# Altium PCB testrack_module_stm32f4v.PcbDoc
Units mm, origin at the board's own origin, x right, y up, seen from the top; angles counter-clockwise.
Board outline 38 x 41.25 mm, 6 copper layers (Top Layer, Signal Layer 1, Signal Layer 2, Signal Layer 3, Signal Layer 4, Bottom Layer), stack 0.827 mm thick; 22 components, 33 nets, 219 pads, 65 vias.
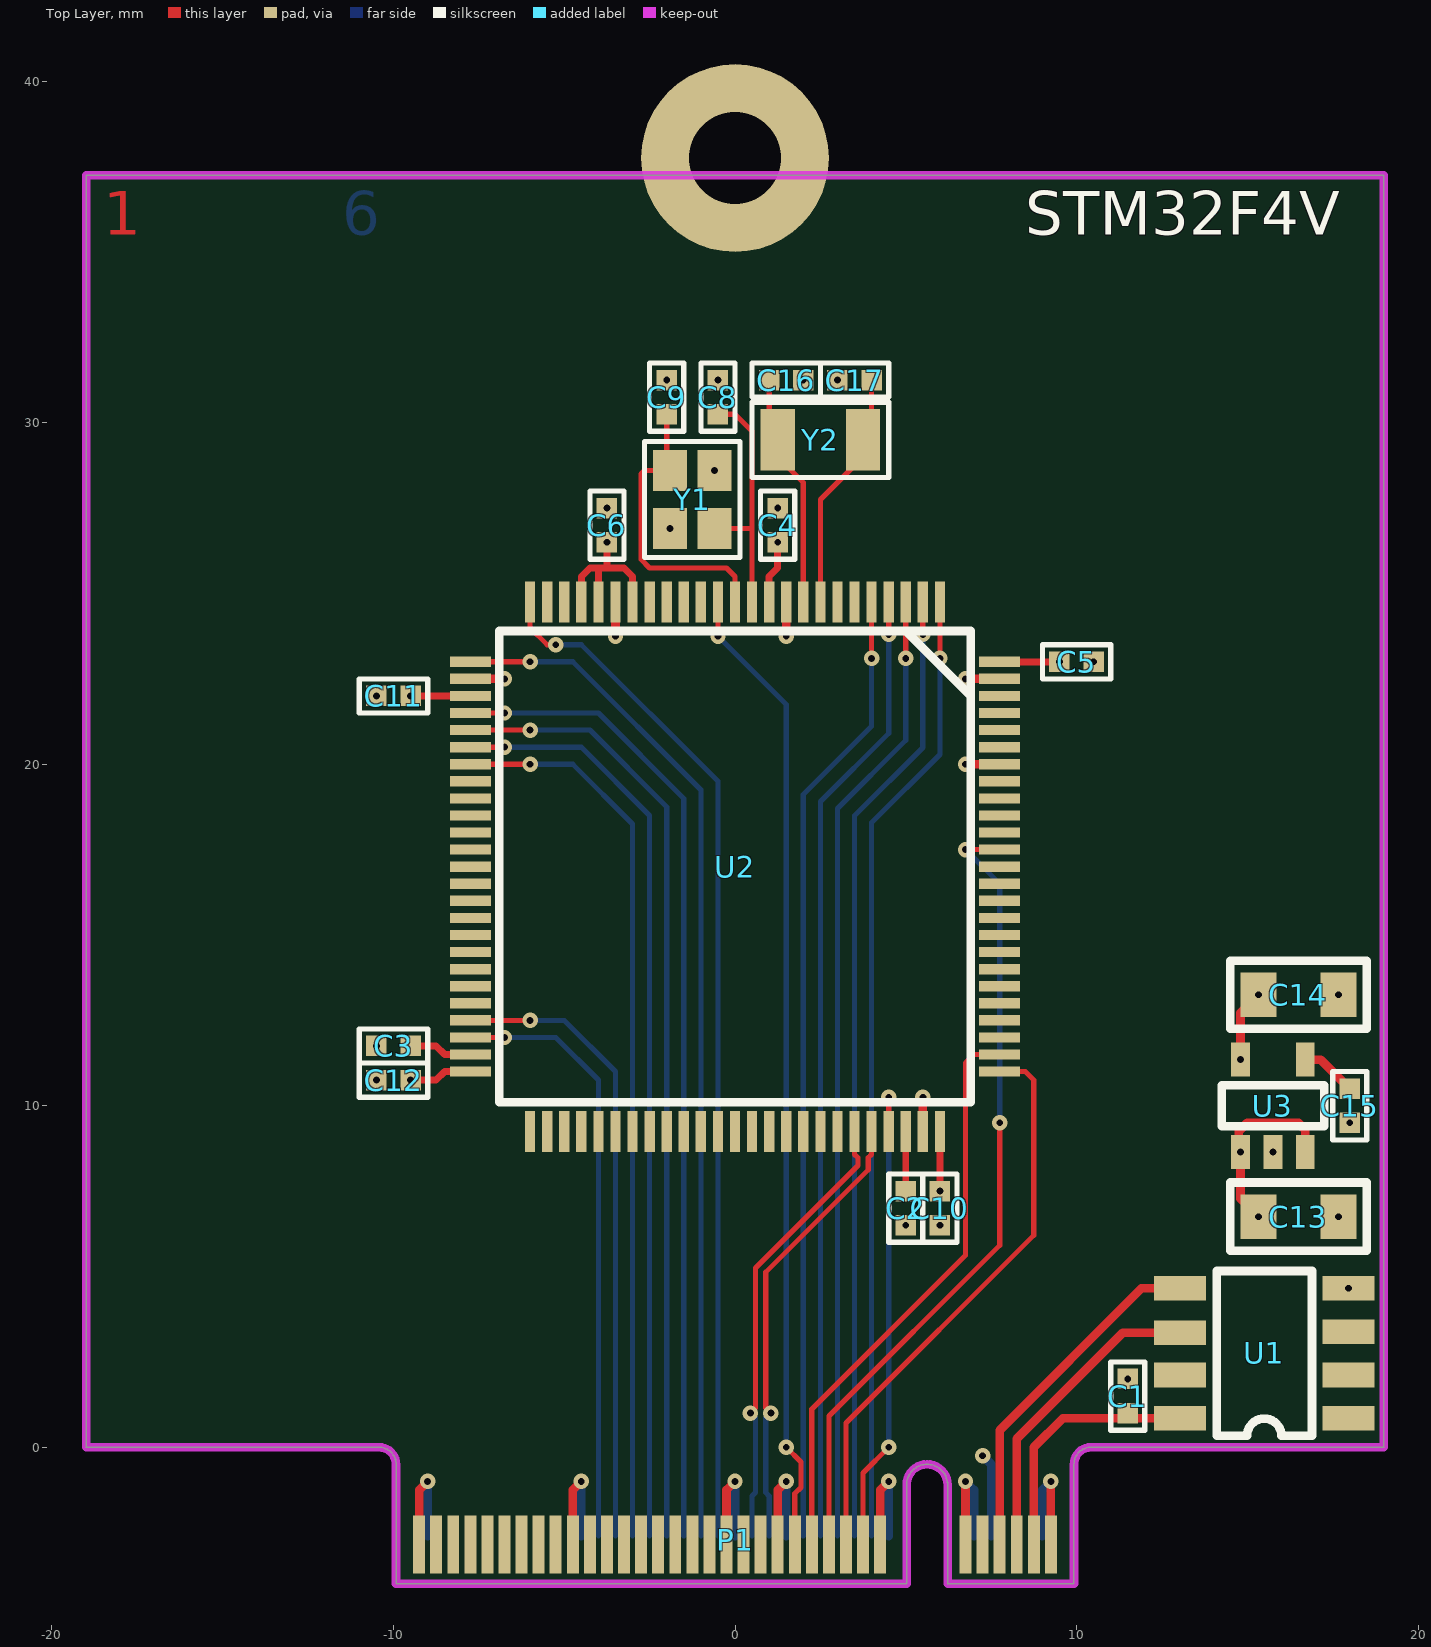
[diagram p0: Top Layer view]
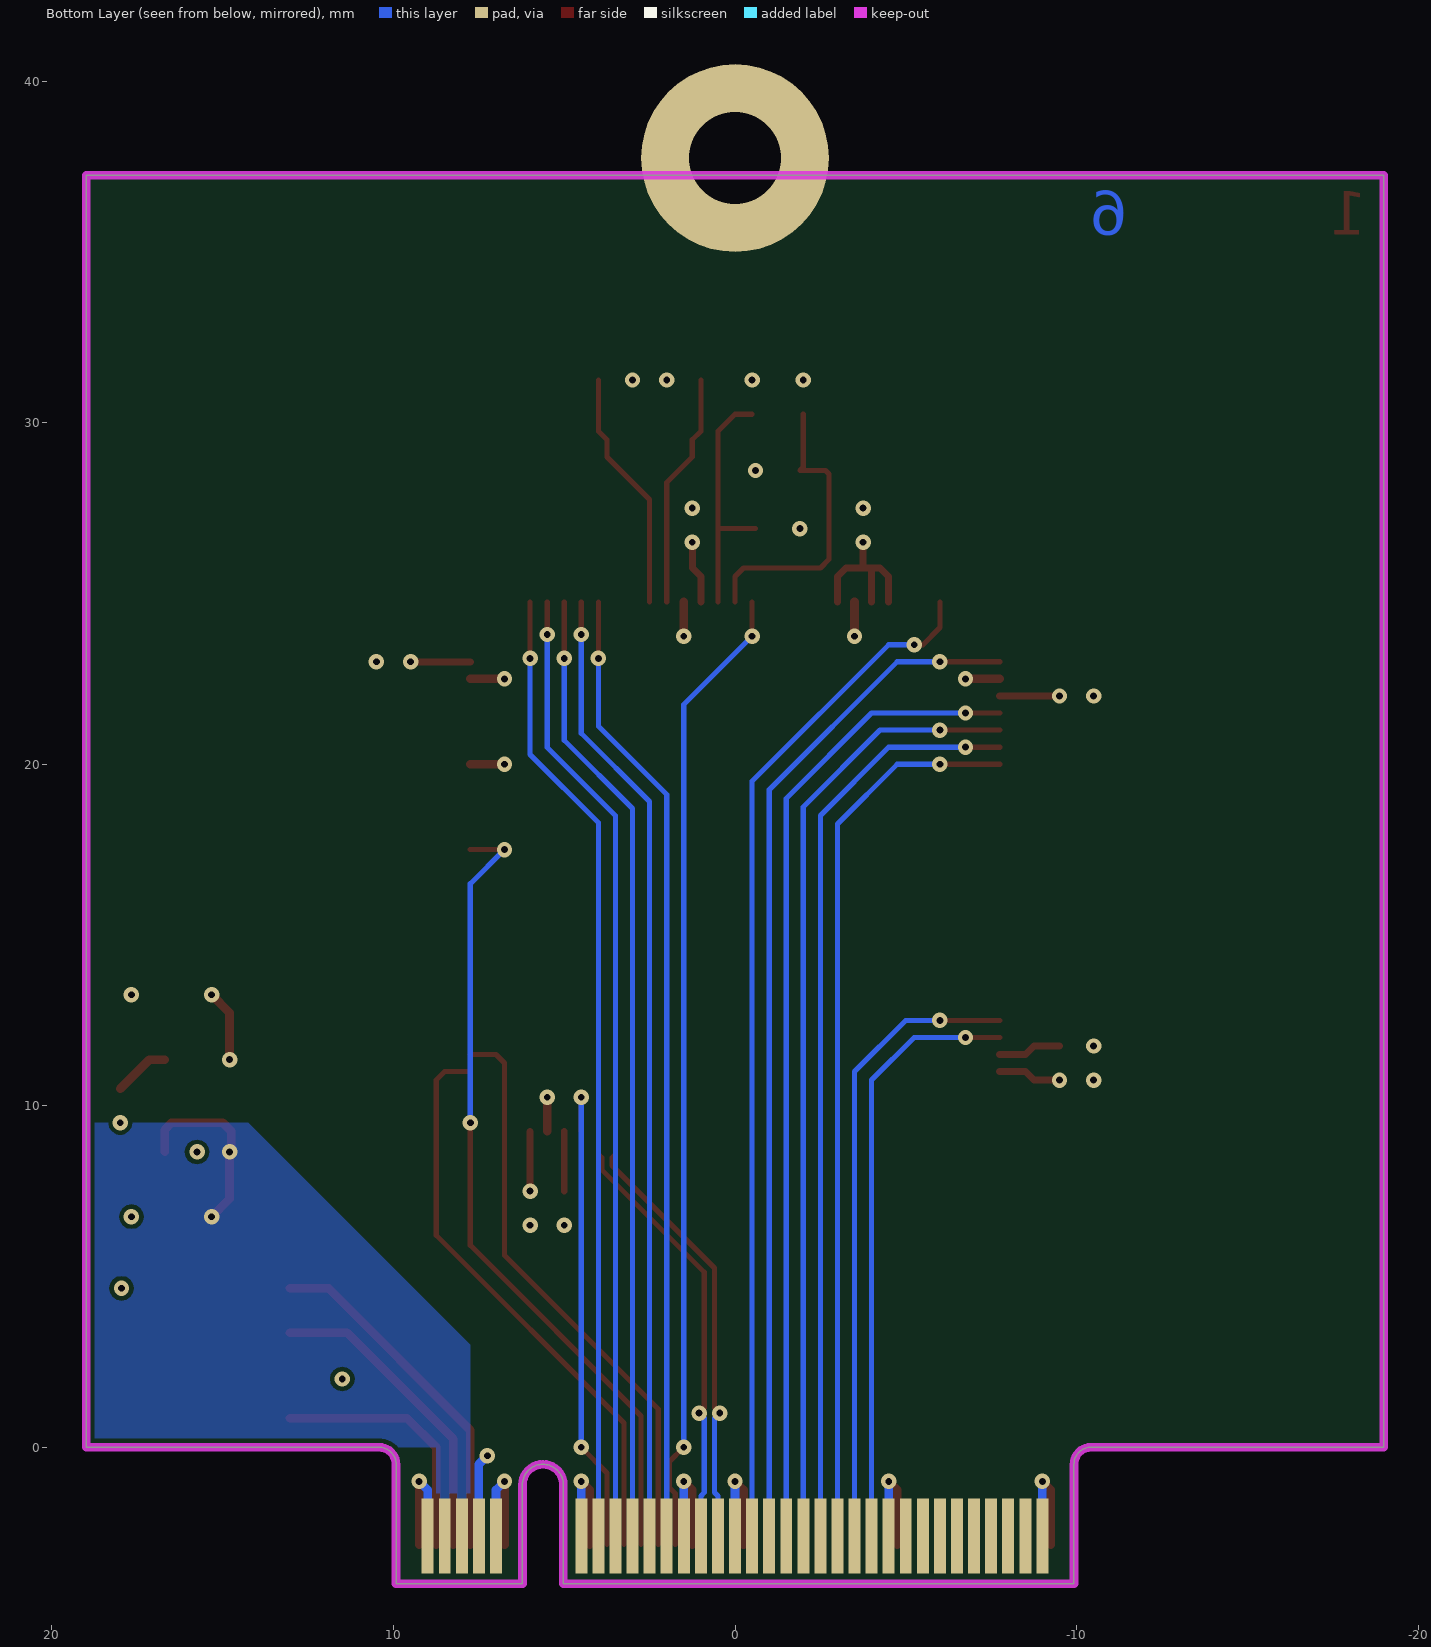
[diagram p1: Bottom Layer view, seen from below]
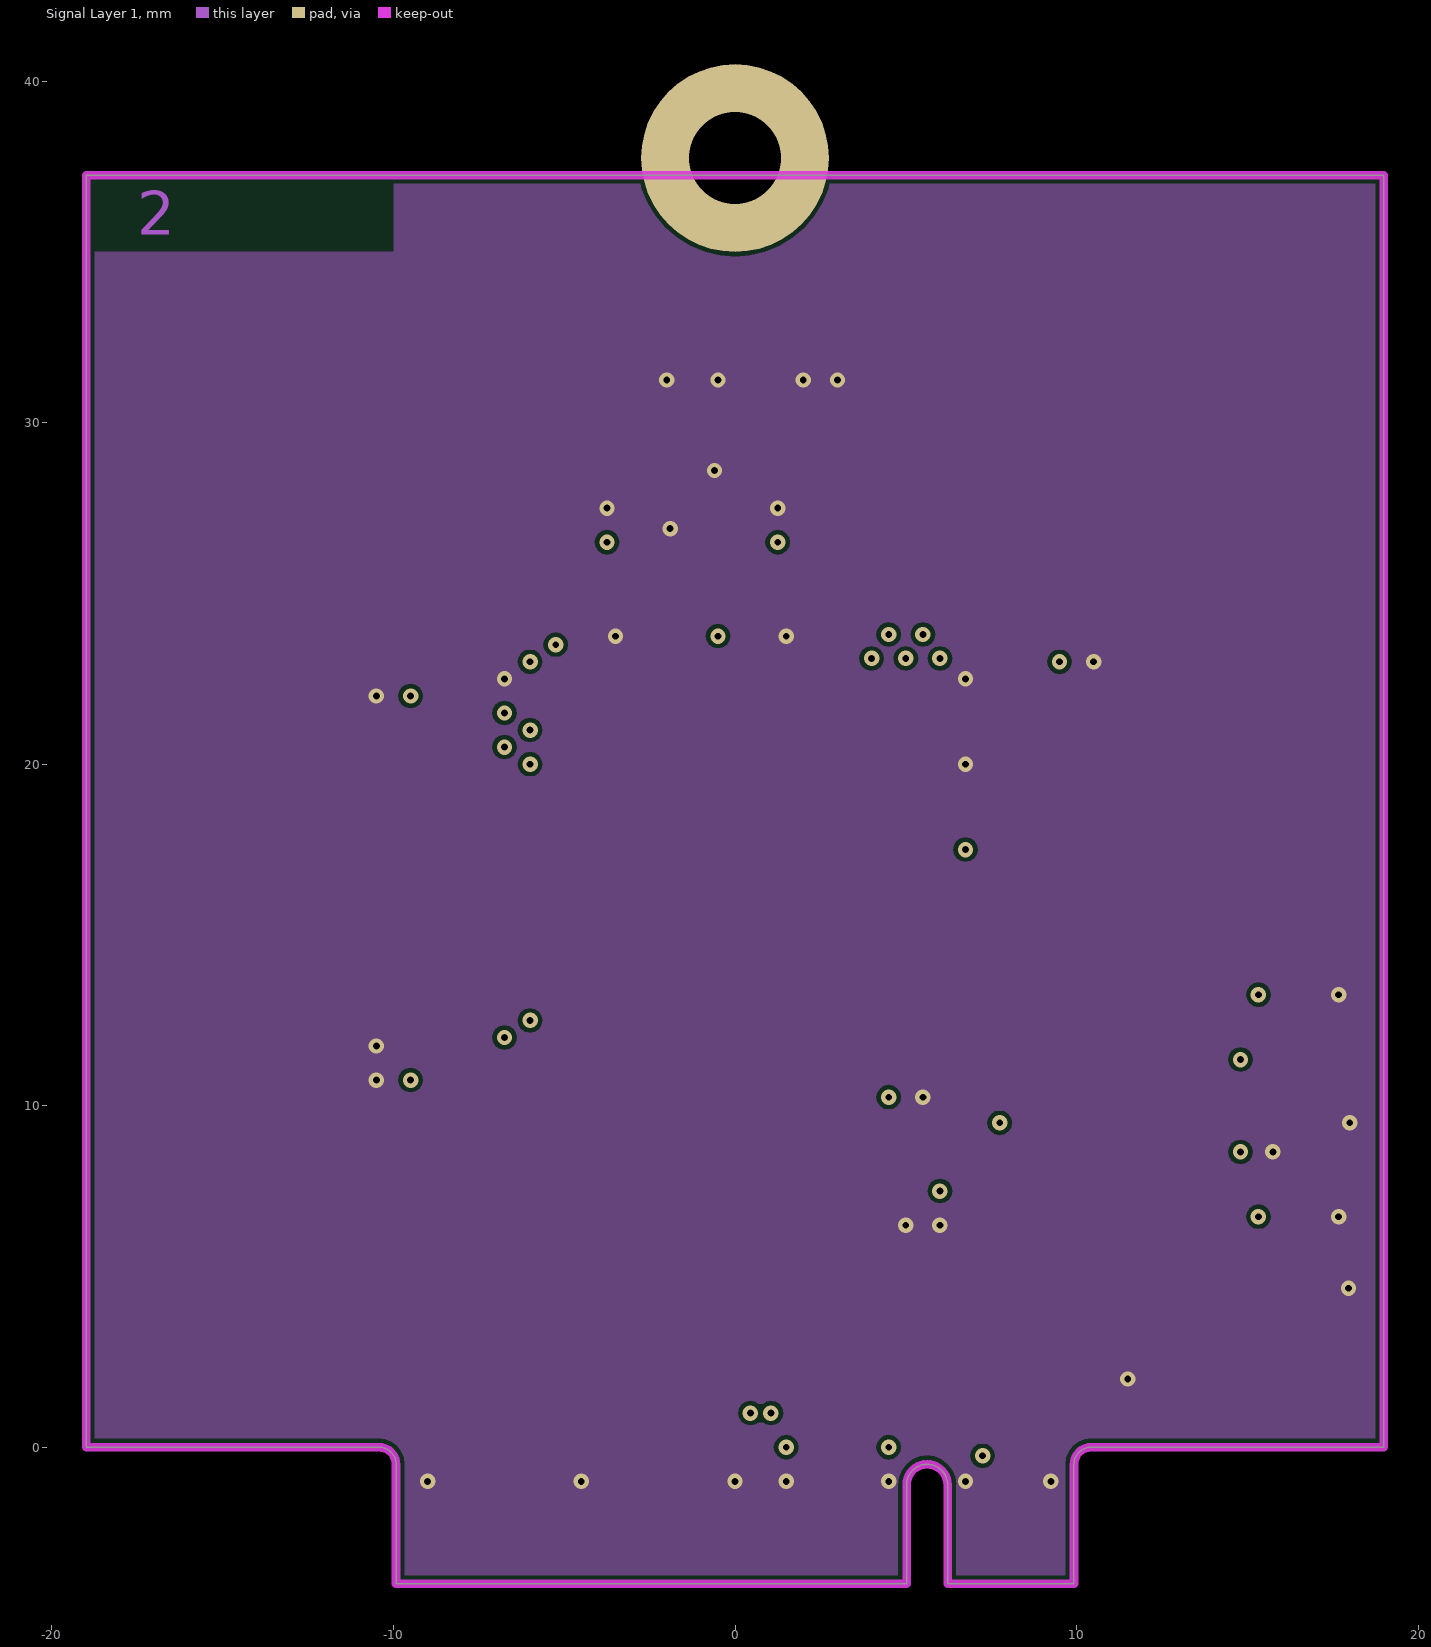
[diagram p2: Signal Layer 1]
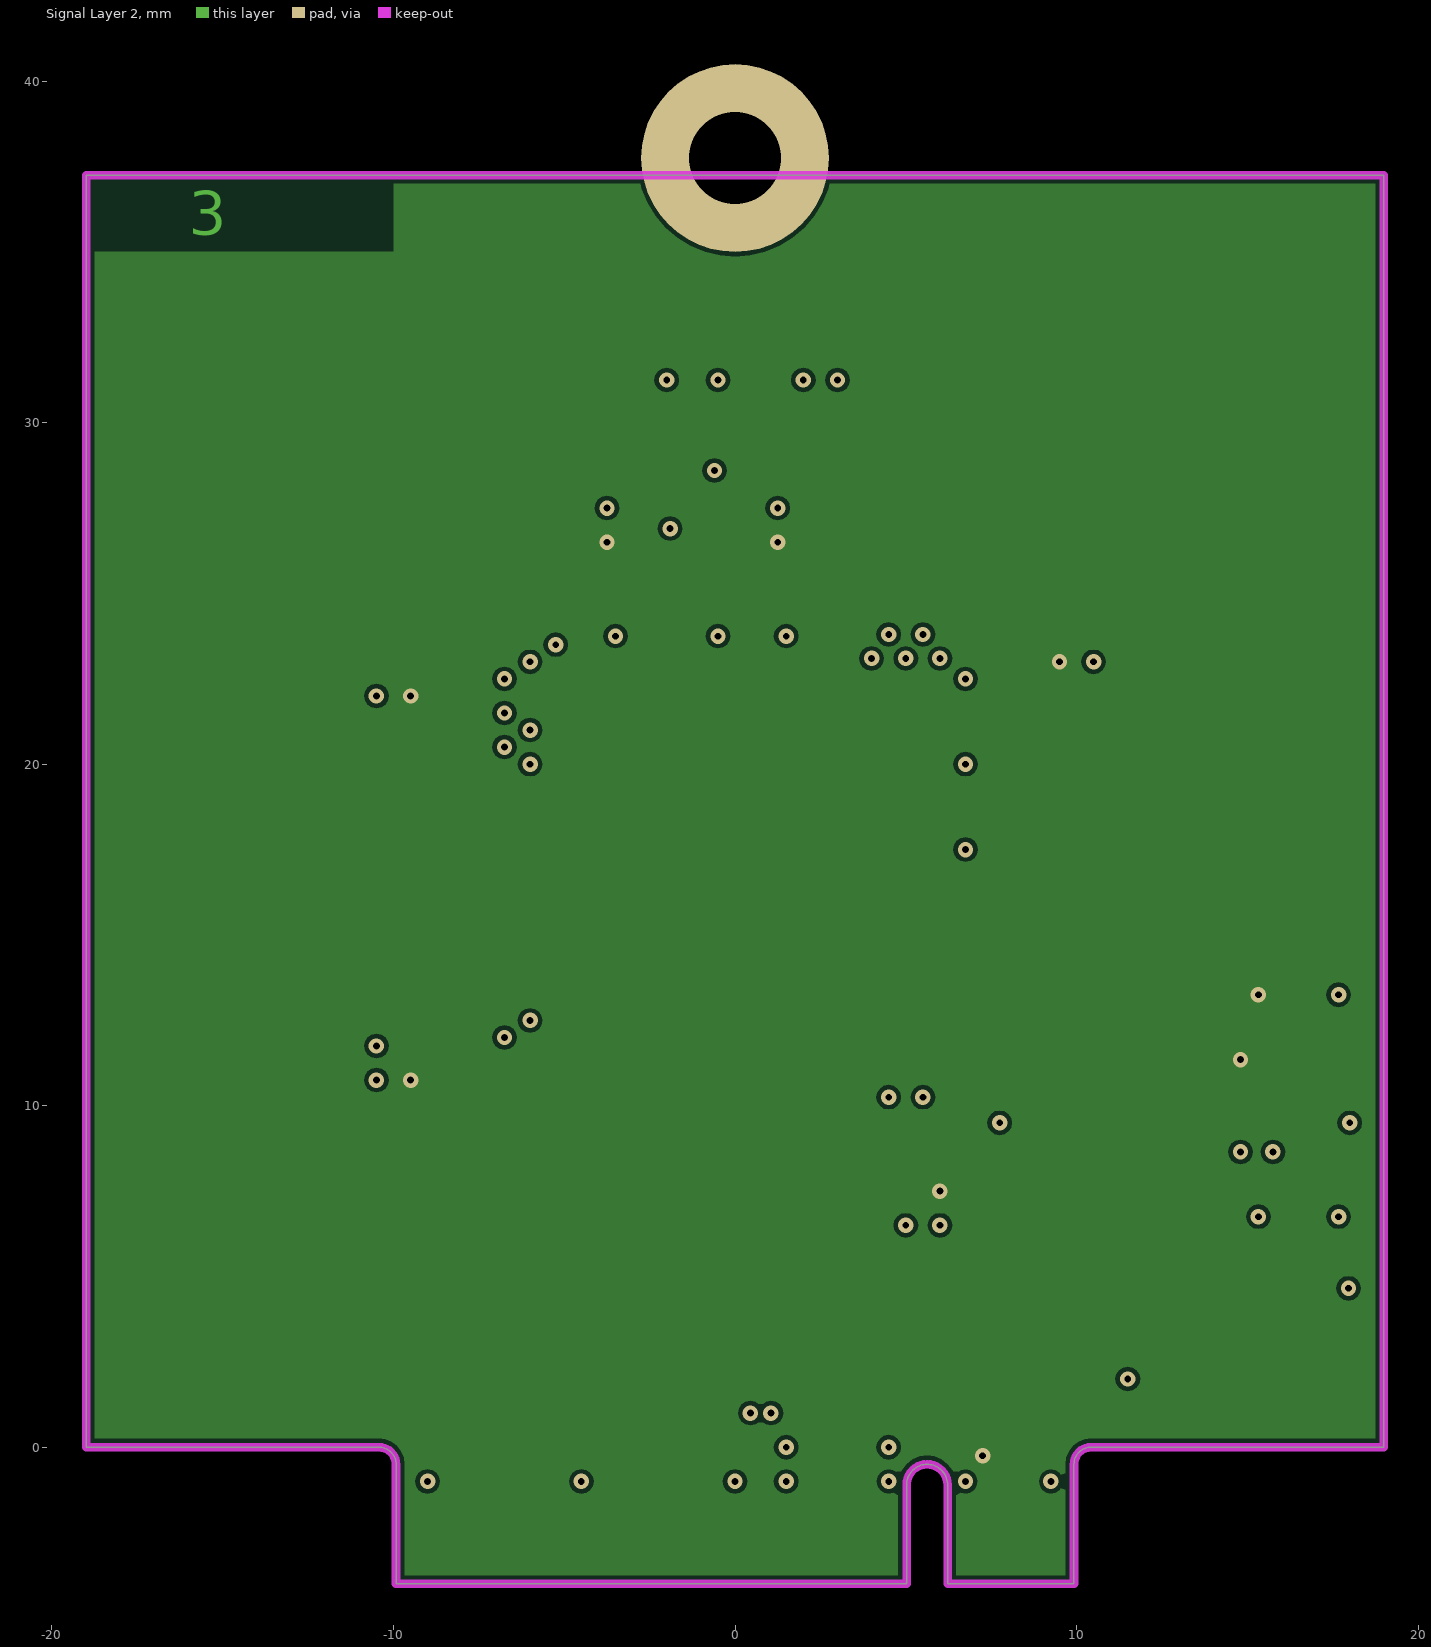
[diagram p3: Signal Layer 2]
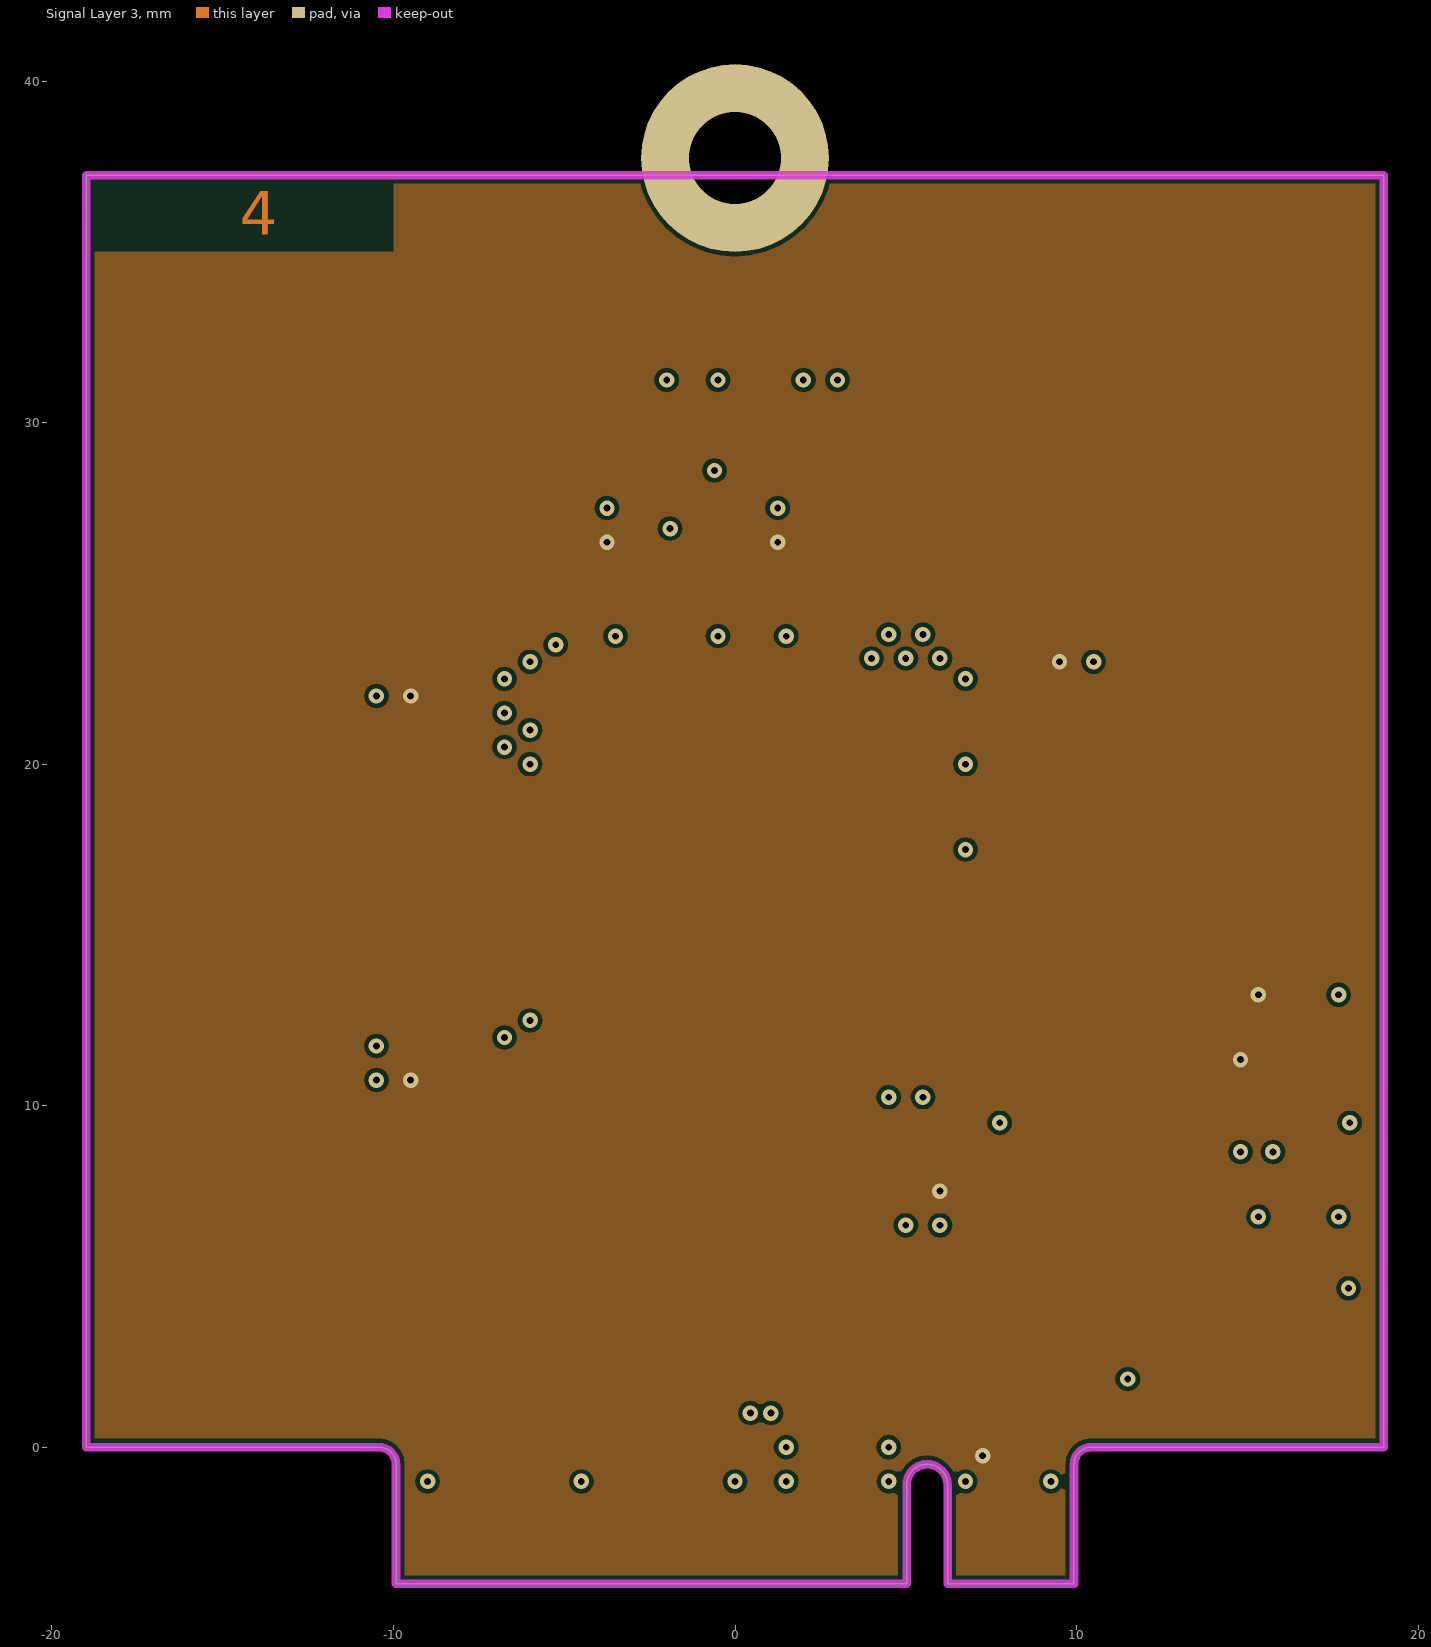
[diagram p4: Signal Layer 3]
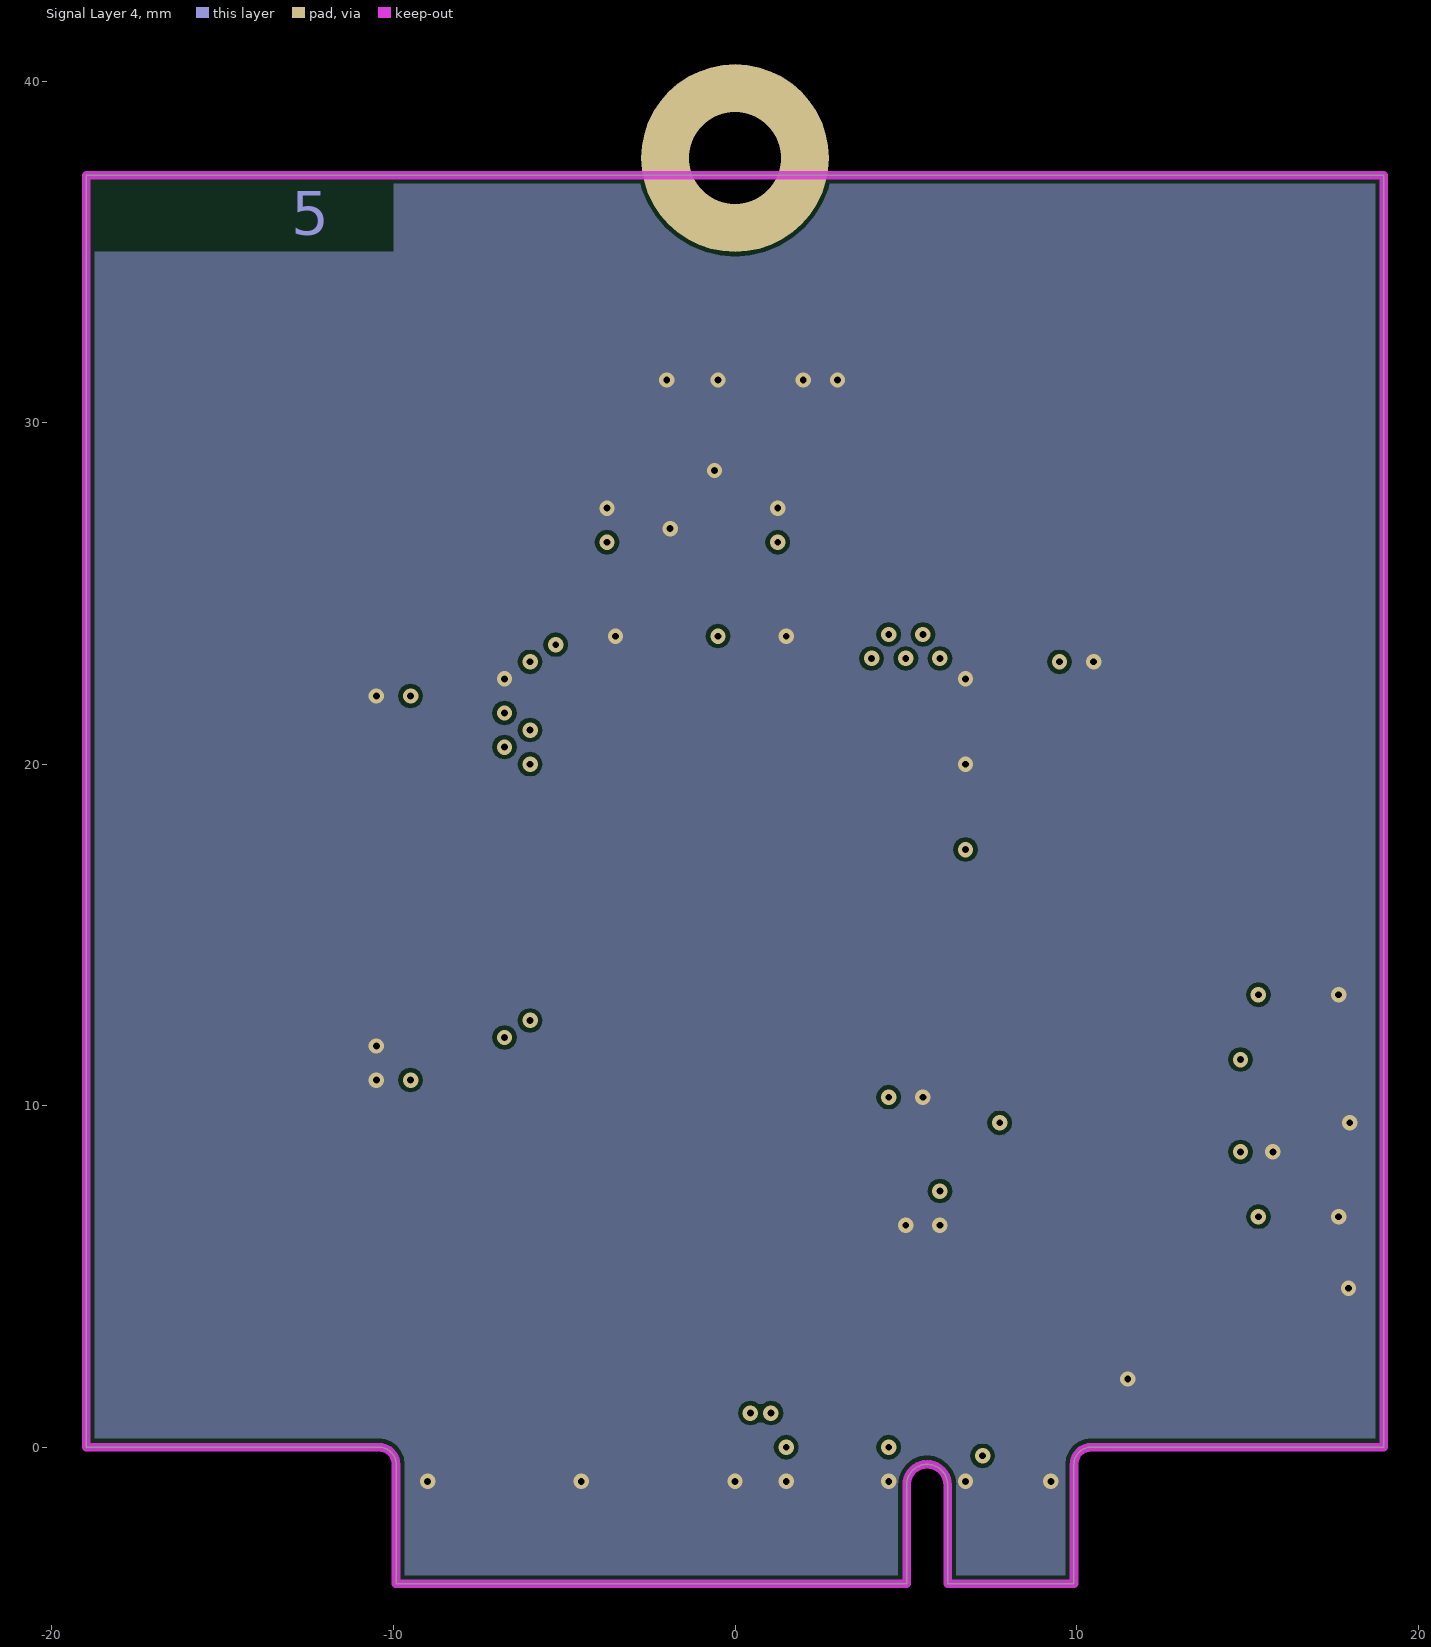
[diagram p5: Signal Layer 4]

## Layer stack, top to bottom
Top Solder: solder mask 0.0102, Solder Resist, Dk 3.5
Top Layer: signal copper 0.0356
Dielectric 1: prepreg 0.1164, Dk 4.2
Signal Layer 1: signal copper 0.0152
Dielectric 3: core 0.13, Dk 4.2
Signal Layer 2: signal copper 0.0152
Dielectric 4: prepreg 0.2028, Dk 4.2
Signal Layer 3: signal copper 0.0152
Dielectric 5: core 0.13, Dk 4.2
Signal Layer 4: signal copper 0.0152
Dielectric 2: prepreg 0.1164, Dk 4.2
Bottom Layer: signal copper 0.0356
Bottom Solder: solder mask 0.0102, Solder Resist, Dk 3.5

## Board outline
-9.925,-4 -9.925,-0.5 ccw(c-10.425,-0.5) -10.425,0 -19,0 -19,37.25 19,37.25 19,0 10.425,0 ccw(c10.425,-0.5) 9.925,-0.5 9.925,-4 6.225,-4 6.225,-1.1 ccw(c5.625,-1.1) 5.625,-0.5 ccw(c5.625,-1.1) 5.025,-1.1 5.025,-4

## Design rules (kind name [scope] priority, off if disabled: settings)
Clearance [All] p1: gap=0.127
ComponentClearance [All] p1: gap=0 collisioncheckmode=3 verticalgap=0.254 showdistances=FALSE
DiffPairsRouting [All] p1: maxlimit=0.254 minlimit=0.152 mostfreqgap=0.152 toplayer_minwidth=0.152 toplayer_maxwidth=0.381 toplayer_prefwidth=0.152 midlayer1_minwidth=0.152 midlayer1_maxwidth=0.381 midlayer1_prefwidth=0.152 midlayer2_minwidth=0.152 midlayer2_maxwidth=0.381 midlayer2_prefwidth=0.152 midlayer3_minwidth=0.152 midlayer3_maxwidth=0.381 midlayer3_prefwidth=0.152 midlayer4_minwidth=0.152 midlayer4_maxwidth=0.381 midlayer4_prefwidth=0.152 bottomlayer_minwidth=0.152 bottomlayer_maxwidth=0.381 bottomlayer_prefwidth=0.152 maxuncoupledlength=12.7
HoleSize [All] p1: absolutevalues=TRUE maxlimit=5 minlimit=0.025 maxpercent=80.000 minpercent=20.000
MinimumSolderMaskSliver [All] p1: minsoldermaskwidth=0
PolygonConnect PolygonConnect_via [IsVia] p1: connectstyle=Direct reliefconductorwidth=0.254 reliefentries=4 polygonreliefangle="90 Angle" airgapwidth=0.254
PolygonConnect [All] p2: connectstyle=Relief reliefconductorwidth=0.254 reliefentries=4 polygonreliefangle="90 Angle" airgapwidth=0.152
RoutingVias [All] p1: holewidth=0.2 width=0.45 viastyle="Through Hole" minholewidth=0.2 minwidth=0.45 maxholewidth=0.2 maxwidth=0.45
SilkToSolderMaskClearance [IsPad] p1: minsilkscreentomaskgap=0 clearancetoexposedcopper=TRUE
SolderMaskExpansion SolderMaskExpansion_via [IsVia] p1: expansion=-0.508
SolderMaskExpansion [All] p2: expansion=0.102
Width [All] p1: maxlimit=1.27 minlimit=0.152 preferedwidth=0.152
25 further rules are at their usual default settings.

## Classes and differential pairs
component class edge: C1 P1 U1
component class mcu: C2 C3 C4 C5 C6 C8 C9 C10 C11 C12 C13 C14 C15 C16 C17 U2 U3 Y1 Y2
differential pair D: +D_P -D_N

## Components (designator, comment, footprint, x,y, rotation, side; value= is the part's Value field where it differs from the comment)
C1 "100nF" 0402 11.5,1.5 r270 top
C2 "2.2u" 0402 5,7 r90 top
C3 "2.2u" 0402 -10,11.75 r0 top
C4 "100n" 0402 1.25,27 r270 top
C5 "100n" 0402 10,23 r180 top
C6 "100n" 0402 -3.75,27 r270 top
C8 "10p" 0402 -0.5,30.75 r90 top
C9 "10p" 0402 -2,30.75 r90 top
C10 "100n" 0402 6,7 r90 top
C11 "100n" 0402 -10,22 r0 top
C12 "100n" 0402 -10,10.75 r0 top
C13 "22uF" 0805 16.5,6.75 r180 top
C14 "22uF" 0805 16.5,13.25 r180 top
C15 "100nF" 0402 18,10 r90 top
C16 "22p" 0402 1.5,31.25 r180 top
C17 "22p" 0402 3.5,31.25 r0 top
P1 "M.2_B" M.2_B_EDGE 0,0 r0 top locked
U1 "24Cxx" SO8 15.5,2.75 r90 top
U2 "STM32F407VG" QFP100 0,17 r180 top
U3 "RT9193-33" SOT23-5 15.75,10 r0 top
Y1 "12MHz" XTAL-2520-4SMD -1.25,27.75 r90 top
Y2 "32.768kHz" XTAL-3215 2.5,29.5 r0 top

## Footprints (in the part's own frame and the unit in brackets; to place one, negate y for a bottom-side part, rotate by r counter-clockwise, add the part's x,y. Pads: shape width x height; smd on the part's side, far side on the other; paste and mask are expansions set on the pad)
0402 [mm]
  rect 0.6x0.6 smd: 1(-0.5,0) 2(0.5,0)
  silkscreen extent -1,-0.5 1,0.5, body extent -0.5,-0.25 0.5,0.25, height 0.4
0805 [mm]
  rect 1.05x1.3 smd: 1(-1.175,0) 2(1.175,0)
  silkscreen extent -2,-1 2,1, body extent -1,-0.63 1,0.63, height 0.8
M.2_B_EDGE [mm] "M.2 Card edge, B-key"
  rect 0.35x1.7 smd paste-1: 1(9.25,-2.85) 3(8.75,-2.85) 5(8.25,-2.85) 7(7.75,-2.85) 9(7.25,-2.85) 11(6.75,-2.85) 21(4.25,-2.85) 23(3.75,-2.85) 25(3.25,-2.85) 27(2.75,-2.85) 29(2.25,-2.85) 31(1.75,-2.85) 33(1.25,-2.85) 35(0.75,-2.85) 37(0.25,-2.85) 39(-0.25,-2.85) 41(-0.75,-2.85) 43(-1.25,-2.85) 45(-1.75,-2.85) 47(-2.25,-2.85) 49(-2.75,-2.85) 51(-3.25,-2.85) 53(-3.75,-2.85) 55(-4.25,-2.85) 57(-4.75,-2.85) 59(-5.25,-2.85) 61(-5.75,-2.85) 63(-6.25,-2.85) 65(-6.75,-2.85) 67(-7.25,-2.85) 69(-7.75,-2.85) 71(-8.25,-2.85) 73(-8.75,-2.85) 75(-9.25,-2.85)
  rect 0.35x2.2 smd far side paste-1: 2(9,-2.6) 4(8.5,-2.6) 6(8,-2.6) 8(7.5,-2.6) 10(7,-2.6) 20(4.5,-2.6) 22(4,-2.6) 24(3.5,-2.6) 26(3,-2.6) 28(2.5,-2.6) 30(2,-2.6) 32(1.5,-2.6) 34(1,-2.6) 36(0.5,-2.6) 38(0,-2.6) 40(-0.5,-2.6) 42(-1,-2.6) 44(-1.5,-2.6) 46(-2,-2.6) 48(-2.5,-2.6) 50(-3,-2.6) 52(-3.5,-2.6) 54(-4,-2.6) 56(-4.5,-2.6) 58(-5,-2.6) 60(-5.5,-2.6) 62(-6,-2.6) 64(-6.5,-2.6) 66(-7,-2.6) 68(-7.5,-2.6) 70(-8,-2.6) 72(-8.5,-2.6) 74(-9,-2.6)
QFP100 [mm]
  rect 0.3x1.2 smd: 1(-6,-7.75) 2(-5.5,-7.75) 3(-5,-7.75) 4(-4.5,-7.75) 5(-4,-7.75) 6(-3.5,-7.75) 7(-3,-7.75) 8(-2.5,-7.75) 9(-2,-7.75) 10(-1.5,-7.75) 11(-1,-7.75) 12(-0.5,-7.75) 13(0,-7.75) 14(0.5,-7.75) 15(1,-7.75) 16(1.5,-7.75) 17(2,-7.75) 18(2.5,-7.75) 19(3,-7.75) 20(3.5,-7.75) 21(4,-7.75) 22(4.5,-7.75) 23(5,-7.75) 24(5.5,-7.75) 25(6,-7.75) 51(6,7.75) 52(5.5,7.75) 53(5,7.75) 54(4.5,7.75) 55(4,7.75) 56(3.5,7.75) 57(3,7.75) 58(2.5,7.75) 59(2,7.75) 60(1.5,7.75) 61(1,7.75) 62(0.5,7.75) 63(0,7.75) 64(-0.5,7.75) 65(-1,7.75) 66(-1.5,7.75) 67(-2,7.75) 68(-2.5,7.75) 69(-3,7.75) 70(-3.5,7.75) 71(-4,7.75) 72(-4.5,7.75) 73(-5,7.75) 74(-5.5,7.75) 75(-6,7.75)
  rect 1.2x0.3 smd: 26(7.75,-6) 27(7.75,-5.5) 28(7.75,-5) 29(7.75,-4.5) 30(7.75,-4) 31(7.75,-3.5) 32(7.75,-3) 33(7.75,-2.5) 34(7.75,-2) 35(7.75,-1.5) 36(7.75,-1) 37(7.75,-0.5) 38(7.75,0) 39(7.75,0.5) 40(7.75,1) 41(7.75,1.5) 42(7.75,2) 43(7.75,2.5) 44(7.75,3) 45(7.75,3.5) 46(7.75,4) 47(7.75,4.5) 48(7.75,5) 49(7.75,5.5) 50(7.75,6) 76(-7.75,6) 77(-7.75,5.5) 78(-7.75,5) 79(-7.75,4.5) 80(-7.75,4) 81(-7.75,3.5) 82(-7.75,3) 83(-7.75,2.5) 84(-7.75,2) 85(-7.75,1.5) 86(-7.75,1) 87(-7.75,0.5) 88(-7.75,0) 89(-7.75,-0.5) 90(-7.75,-1) 91(-7.75,-1.5) 92(-7.75,-2) 93(-7.75,-2.5) 94(-7.75,-3) 95(-7.75,-3.5) 96(-7.75,-4) 97(-7.75,-4.5) 98(-7.75,-5) 99(-7.75,-5.5) 100(-7.75,-6)
  silkscreen extent -6.9,-6.9 6.9,6.9, body extent -7,-7 7,7, height 1.6
SO8 [mil]
  rect 28.35x60 smd: 1(-75,-97) 2(-25,-97) 3(25,-97) 4(75,-97) 5(75,97) 6(23.82,97) 7(-25,97) 8(-75,97)
  silkscreen extent -95,-55 95,55
SOT23-5 [mm]
  rect 0.55x1 smd: 1(-0.95,-1.35) 2(0,-1.35) 3(0.95,-1.35) 4(0.95,1.35) 5(-0.95,1.35)
  silkscreen extent -1.5,-0.6 1.5,0.6
XTAL-2520-4SMD [mm]
  rect 1.2x1 smd: 1(-0.85,-0.65) 2(0.85,-0.65) 3(0.85,0.65) 4(-0.85,0.65)
  silkscreen extent -1.7,-1.4 1.7,1.4
XTAL-3215 [mm]
  rect 1x1.8 smd: 1(-1.25,0) 2(1.25,0)
  silkscreen extent -2,-1.1 2,1.1

## Part data
C1 C2 C3 C4 C5 C6 C8 C9 C10 C11 C12 C13 C14 C15 C16 C17: library part Capacitor
U2: library part STM32F40xV
U3: library part VREG_EN_BP
Y1: library part XTAL_4SMD
Y2: library part XTAL

## Free pads (board coordinates)
  round 5.5 hole 2.7: ""(0,37.75)

## Via types
v1: diameter 0.45, hole 0.2, Top Layer to Bottom Layer, 65 vias

## Nets (pads, with @x,y where several pads share a name; then routed paths per layer and width w, separated by ;. In a path a pad name is that pad's centre, name@x,y a point inside that pad or via, vN(x,y) a via of type N, cw(c..) or ccw(c..) an arc to the next point about the centre after c; other vN are vias at no path point)
D_N: P1.36 U2.70 | length 13.3
  Top Layer w0.152: v1(0.449,1) 0.598,1.149 0.598,5.25 3.598,8.25 3.598,8.476 3.5,8.574 U2.70
  Bottom Layer w0.152: v1(0.449,1) 0.598,0.851 0.598,-1.326 0.5,-1.424 P1.36
D_P: P1.34 U2.71 | length 13.3
  Top Layer w0.152: v1(1.051,1) 0.902,1.149 0.902,5.124 3.902,8.124 3.902,8.476 4,8.574 U2.71
  Bottom Layer w0.152: P1.34 1,-1.424 0.902,-1.326 0.902,0.851 v1(1.051,1)
GND: C1.1 C2.1 C3.1 C4.1 C5.1 C6.1 C8.2 C9.2 C10.1 C11.1 C12.1 C13.1 C14.1 C15.1 C16.1 C17.1 P1.1 P1.2 P1.10 P1.11 P1.20 P1.21 P1.32 P1.33 P1.38 P1.39 P1.56 P1.57 P1.74 P1.75 U1.4 U2.10 U2.20 U2.27 U2.74 U2.94 U2.99 U3.2 Y1.2 Y1.4 | length 30.9
  Top Layer w0.254: P1.75 -9.25,-1.25 v1(-9,-1) ; U2.27 v1(-6.75,22.5) ; P1.57 -4.75,-1.25 v1(-4.5,-1) ; v1(-3.5,23.75) U2.20 ; P1.39 -0.25,-1.25 v1(0,-1) ; P1.33 1.25,-1.25 v1(1.5,-1) ; v1(1.5,23.75) U2.10 ; P1.21 4.25,-1.25 v1(4.5,-1) ; U2.74 v1(5.5,10.25) ; P1.11 v1(6.75,-1) ; v1(6.75,20) U2.94 ; v1(6.75,22.5) U2.99 ; P1.1 v1(9.25,-1)
  Bottom Layer w0.254: P1.74 v1(-9,-1) ; P1.56 v1(-4.5,-1) ; P1.38 v1(0,-1) ; P1.32 v1(1.5,-1) ; P1.20 v1(4.5,-1) ; v1(6.75,-1) 7,-1.25 P1.10 ; P1.2 9,-1.25 v1(9.25,-1)
  other v1: 11.5,2 17.964,4.655 5,6.5 6,6.5 17.675,6.75 15.75,8.65 18,9.5 -10.5,10.75 -10.5,11.75 17.675,13.25 -10.5,22 10.5,23 -1.9,26.9 -3.75,27.5 1.25,27.5 -0.6,28.6 -2,31.25 -0.5,31.25 2,31.25 3,31.25
GPIO0: P1.40 U2.25 | length 30.2
  Top Layer w0.152: U2.25 -6,24 -5.5,23.5 v1(-5.25,23.5)
  Bottom Layer w0.152: v1(-5.25,23.5) -4.5,23.5 -0.5,19.5 P1.40
GPIO1: P1.42 U2.26 | length 30.2
  Top Layer w0.152: U2.26 v1(-6,23)
  Bottom Layer w0.152: v1(-6,23) -4.75,23 -1,19.25 P1.42
GPIO2: P1.44 U2.29 | length 28.9
  Top Layer w0.152: U2.29 v1(-6.75,21.5)
  Bottom Layer w0.152: v1(-6.75,21.5) -4,21.5 -1.5,19 P1.44
GPIO3: P1.46 U2.30 | length 28
  Top Layer w0.152: U2.30 v1(-6,21)
  Bottom Layer w0.152: v1(-6,21) -4.25,21 -2,18.75 P1.46
GPIO4: P1.48 U2.31 | length 27.2
  Top Layer w0.152: U2.31 v1(-6.75,20.5)
  Bottom Layer w0.152: v1(-6.75,20.5) -4.5,20.5 -2.5,18.5 P1.48
GPIO5: P1.50 U2.32 | length 26.3
  Top Layer w0.152: U2.32 v1(-6,20)
  Bottom Layer w0.152: v1(-6,20) -4.75,20 -3,18.25 P1.50
GPIO6: P1.52 U2.47 | length 18.5
  Top Layer w0.152: U2.47 v1(-6,12.5)
  Bottom Layer w0.152: v1(-6,12.5) -5,12.5 -3.5,11 P1.52
GPIO7: P1.54 U2.48 | length 17.6
  Top Layer w0.152: U2.48 v1(-6.75,12)
  Bottom Layer w0.152: v1(-6.75,12) -5.25,12 -4,10.75 P1.54
JTCK: P1.25 U2.76 | length 17
  Top Layer w0.152: P1.25 3.25,0.707 8.75,6.207 8.75,10.75 8.5,11 U2.76
JTDI: P1.29 U2.77 | length 17.1
  Top Layer w0.152: P1.29 2.25,1.121 6.75,5.621 6.75,11.25 7,11.5 U2.77
JTDO: P1.27 U2.89 | length 23.8
  Top Layer w0.152: P1.27 2.75,0.914 7.75,5.914 v1(7.75,9.5) ; v1(6.75,17.5) U2.89
  Bottom Layer w0.152: v1(6.75,17.5) 7.75,16.5 v1(7.75,9.5)
JTMS: P1.23 U2.72 | length 14.4
  Top Layer w0.152: P1.23 3.75,-0.75 v1(4.5,0) ; U2.72 v1(4.5,10.25)
  Bottom Layer w0.152: v1(4.5,0) v1(4.5,10.25)
MGMT_SCL: P1.5 U1.6 | length 9.2
  Top Layer w0.254: P1.5 8.25,0.25 11.355,3.355 U1.6
MGMT_SDA: P1.7 U1.5 | length 10.4
  Top Layer w0.254: P1.7 7.75,0.5 11.905,4.655 U1.5
NetC2_2: C2.2 U2.73 | length 1.8
  Top Layer w0.203: C2.2 U2.73
NetC3_2: C3.2 U2.49 | length 1.9
  Top Layer w0.203: C3.2 -8.75,11.75 -8.5,11.5 U2.49
NetC8_1: C8.1 U2.12 Y1.1 | length 7.3
  Top Layer w0.152: Y1.1 0.5,26.9 ; C8.1 0,30.25 0.5,29.75 0.5,26.9 ; U2.12 0.5,26.9
NetC9_1: C9.1 U2.13 Y1.3 | length 8.8
  Top Layer w0.152: C9.1 -2,28.7 Y1.3 -2.65,28.6 -2.75,28.5 -2.75,26 -2.5,25.75 -0.25,25.75 0,25.5 U2.13
NetC15_2: C15.2 U3.4 | length 1.7
  Top Layer w0.254: U3.4 17.15,11.35 C15.2
NetC16_2: C16.2 U2.9 Y2.1 | length 6.9
  Top Layer w0.152: C16.2 1,29.75 Y2.1 1.25,29 2,28.25 U2.9
NetC17_2: C17.2 U2.8 Y2.2 | length 7.1
  Top Layer w0.152: U2.8 2.5,27.75 3.75,29 Y2.2 4,29.75 C17.2
NRST: P1.31 U2.14 | length 28.7
  Top Layer w0.152: v1(-0.5,23.75) U2.14 ; v1(1.5,0) 1.928,-0.428 1.928,-1.177 1.75,-1.356 P1.31
  Bottom Layer w0.152: v1(-0.5,23.75) 1.5,21.75 v1(1.5,0)
TRACECLK: P1.22 U2.1 | length 28.2
  Top Layer w0.152: v1(6,23.1) U2.1
  Bottom Layer w0.152: P1.22 4,18.286 6,20.286 v1(6,23.1)
TRACED0: P1.24 U2.2 | length 28.2
  Top Layer w0.152: v1(5.5,23.8) U2.2
  Bottom Layer w0.152: P1.24 3.5,18.493 5.5,20.493 v1(5.5,23.8)
TRACED1: P1.26 U2.3 | length 28.2
  Top Layer w0.152: v1(5,23.1) U2.3
  Bottom Layer w0.152: P1.26 3,18.7 5,20.7 v1(5,23.1)
TRACED2: P1.28 U2.4 | length 28.2
  Top Layer w0.152: v1(4.5,23.8) U2.4
  Bottom Layer w0.152: P1.28 2.5,18.907 4.5,20.907 v1(4.5,23.8)
TRACED3: P1.30 U2.5 | length 28.2
  Top Layer w0.152: v1(4,23.1) U2.5
  Bottom Layer w0.152: P1.30 2,19.114 4,21.114 v1(4,23.1)
V3.3: C4.2 C5.2 C6.2 C10.2 C11.2 C12.2 C14.2 P1.8 U2.11 U2.19 U2.21 U2.22 U2.28 U2.50 U2.75 U2.100 U3.5 | length 18.5
  Top Layer w0.203: v1(-9.5,10.75) -8.75,10.75 -8.5,11 U2.50 ; v1(-9.5,22) U2.28 ; U2.22 -4.5,25.5 -4.25,25.75 -4,25.75 ; U2.21 -4,25.75 ; v1(-3.75,26.5) -3.75,25.75 ; U2.19 -3,25.5 -3.25,25.75 -3.75,25.75 ; U2.11 1,25.5 1.25,25.75 v1(1.25,26.5) ; v1(6,7.5) U2.75 ; U2.100 v1(9.5,23) ; -4,25.75 -3.75,25.75
  Top Layer w0.254: v1(14.8,11.35) 14.8,12.725 v1(15.325,13.25)
  Bottom Layer w0.254: v1(7.25,-0.25) 7.5,-0.5 P1.8
VIN: C13.2 P1.4 P1.6 U3.1 U3.3 | length 5.5
  Top Layer w0.254: v1(15.325,6.75) 14.8,7.275 v1(14.8,8.65) 14.75,8.7 14.75,9.25 15,9.5 16.5,9.5 16.7,9.3 U3.3
VMGMT: C1.2 P1.3 U1.8 | length 7.5
  Top Layer w0.254: P1.3 8.75,0 9.595,0.845 U1.8
pads on no net: P1.9 P1.35 P1.37 P1.41 P1.43 P1.45 P1.47 P1.49 P1.51 P1.53 P1.55 P1.58 P1.59 P1.60 P1.61 P1.62 P1.63 P1.64 P1.65 P1.66 P1.67 P1.68 P1.69 P1.70 P1.71 P1.72 P1.73 U1.1 U1.2 U1.3 U1.7 U2.6 U2.7 U2.15 U2.16 U2.17 U2.18 U2.23 U2.24 U2.33 U2.34 U2.35 U2.36 U2.37 U2.38 U2.39 U2.40 U2.41 U2.42 U2.43 U2.44 U2.45 U2.46 U2.51 U2.52 U2.53 U2.54 U2.55 U2.56 U2.57 U2.58 U2.59 U2.60 U2.61 U2.62 U2.63 U2.64 U2.65 U2.66 U2.67 U2.68 U2.69 U2.78 U2.79 U2.80 U2.81 U2.82 U2.83 U2.84 U2.85 U2.86 U2.87 U2.88 U2.90 U2.91 U2.92 U2.93 U2.95 U2.96 U2.97 U2.98

## Polygon pours and split planes (outlines as drawn)
GND on Signal Layer 1 "GND_L02_P000" (solid, remove dead copper, pour order 0): -19,37.25 -19,-4 19,-4 19,37.25
GND on Signal Layer 4 "GND_L05_P002" (solid, remove dead copper, pour order 2): -19,37.25 -19,-4 19,-4 19,37.25
V3.3 on Signal Layer 3 "V3.3_L04_P004" (solid, remove dead copper, pour order 4): -19,37.25 -19,-4 19,-4 19,37.25
VIN on Bottom Layer "VIN_L06_P006" (solid, remove dead copper, pour order 6): 7.75,-2.75 7.75,3 14.25,9.5 19,9.5 19,0 8.75,0 8.75,-2.75
V3.3 on Signal Layer 2 "V3.3_L03_P008" (solid, remove dead copper, pour order 8): -19,37.25 -19,-4 19,-4 19,37.25

## Keep-outs
Keep-Out Layer:
  the board outline again, w0.254

## Other copper
Top Layer:
  text "1" at -18.5,35.5 h1.27
Signal Layer 1:
  pour cut-out: -10,37.25 -19,37.25 -19,35 -10,35
  text "2" at -17.5,35.5 h1.27
Signal Layer 2:
  pour cut-out: -10,37.25 -19,37.25 -19,35 -10,35
  text "3" at -16,35.5 h1.27
Signal Layer 3:
  pour cut-out: -10,37.25 -19,37.25 -19,35 -10,35
  text "4" at -14.5,35.5 h1.27
Signal Layer 4:
  pour cut-out: -10,37.25 -19,37.25 -19,35 -10,35
  text "5" at -13,35.5 h1.27
Bottom Layer:
  text "6" at -11.5,35.5 h1.27

## Silkscreen, mask and mechanical layers (free items; w line width, h text height)
Top Overlay:
  text "STM32F4V" at 8.5,35.5 h1.27
Top Solder:
  rectangle: -19,35 -10,37.25
Bottom Solder:
  rectangle: -19,35 -10,37.25